# EAGLE board USER (EAGLE 9.3.0)

Size 160 x 100 mm. Coordinates in mm from the lower left corner, seen from the top.
Outline: 0,0 160,0 160,100 0,100 0,0
Copper layers (1*16): Top 0.035mm / dielectric 1.5mm / Bottom 0.035mm
Design rules "default": minimum track width 6mil, minimum drill 0.35mm, track to track 6mil, track to pad 6mil, pad to pad 6mil, via to via 6mil, smd to smd 6mil, copper to edge 40mil, drill to drill 6mil, minimum pad ring 10mil, minimum via ring 8mil, stop-mask expansion 4mil, vias tented up to drill 0mil, thermal gap 10mil

## Footprints (pad centres in the part's own frame; a part is rotated, then mirrored left to right if it is on the bottom)
C0805 = smd 1.3 x 1.5: 1 -0.95,0; 2 0.95,0
085CS_1AR = smd 2.9 x 2.5: + 3.25,0; - -3.25,0
SO14 = smd 0.6 x 2.2: 1 -3.81,-2.6; 2 -2.54,-2.6; 3 -1.27,-2.6; 4 0,-2.6; 5 1.27,-2.6; 6 2.54,-2.6; 7 3.81,-2.6; 8 3.81,2.6; 9 2.54,2.6; 10 1.27,2.6; 11 0,2.6; 12 -1.27,2.6; 13 -2.54,2.6; 14 -3.81,2.6
SC70-5 = smd 0.4 x 0.7: 1 -0.65,-0.85; 2 0,-0.85; 3 0.65,-0.85; 4 0.65,0.85; 5 -0.65,0.85
R0805 = smd 1.3 x 1.5: 1 -0.95,0; 2 0.95,0
RTRIM3224X = smd 1.32 x 1.9: 1 -1.27,-2.54; 3 1.27,-2.54 | smd 2 x 2: 2 0,2.54

## Placement (x,y rotation side)
C3  [C0805]  -15.24,86.36 0 top  (outside the outline)
C4  [C0805]  -20.32,86.36 0 top  (outside the outline)
C5  [085CS_1AR]  -52.07,20.32 0 top  (outside the outline)
C6  [C0805]  -25.4,86.36 0 top  (outside the outline)
C7  [C0805]  -30.48,86.36 0 top  (outside the outline)
C8  [C0805]  -35.56,86.36 0 top  (outside the outline)
C9  [C0805]  -40.64,86.36 0 top  (outside the outline)
C10  [C0805]  -27.94,81.28 0 top  (outside the outline)
C11  [C0805]  -53.34,81.28 0 top  (outside the outline)
C12  [C0805]  -33.02,81.28 0 top  (outside the outline)
C13  [C0805]  -38.1,81.28 0 top  (outside the outline)
C14  [C0805]  -43.18,81.28 0 top  (outside the outline)
C15  [C0805]  -48.26,81.28 0 top  (outside the outline)
IC1  OP11D  [SO14]  -19.05,3.81 0 top  (outside the outline)
IC3  OP11D  [SO14]  -82.55,-5.08 0 top  (outside the outline)
IC4  OP11D  [SO14]  -60.96,3.81 0 top  (outside the outline)
IC5  OP11D  [SO14]  -74.93,3.81 0 top  (outside the outline)
IC6  74AHC1G32DCK  [SC70-5]  -25.4,44.45 0 top  (outside the outline)
IC7  OP11D  [SO14]  -82.55,-26.67 0 top  (outside the outline)
IC8  OP11D  [SO14]  -19.05,12.7 0 top  (outside the outline)
IC9  74AHC1G32DCK  [SC70-5]  -55.88,44.45 0 top  (outside the outline)
IC10  74AHC1G32DCK  [SC70-5]  -71.12,44.45 0 top  (outside the outline)
IC13  OP11D  [SO14]  -60.96,12.7 0 top  (outside the outline)
IC14  74AHC1G32DCK  [SC70-5]  -86.36,44.45 0 top  (outside the outline)
IC17  OP11D  [SO14]  -33.02,21.59 0 top  (outside the outline)
IC18  74AHC1G32DCK  [SC70-5]  -25.4,50.8 0 top  (outside the outline)
IC19  OP11D  [SO14]  -82.55,-48.26 0 top  (outside the outline)
IC20  OP11D  [SO14]  -82.55,-69.85 0 top  (outside the outline)
R1  12k  [R0805]  -80.01,-19.05 0 top  (outside the outline)
R2  27k  [R0805]  -74.93,-19.05 0 top  (outside the outline)
R3  [R0805]  -68.58,81.28 0 top  (outside the outline)
R4  [R0805]  -73.66,81.28 0 top  (outside the outline)
R5  10k  [R0805]  -26.67,76.2 0 top  (outside the outline)
R6  10k  [R0805]  -31.75,76.2 0 top  (outside the outline)
R7  12k  [R0805]  -36.83,76.2 0 top  (outside the outline)
R8  10k  [R0805]  -41.91,76.2 0 top  (outside the outline)
R9  10k  [R0805]  -46.99,76.2 0 top  (outside the outline)
R10  10k  [R0805]  -31.75,50.8 0 top  (outside the outline)
R11  10k  [R0805]  -21.59,76.2 0 top  (outside the outline)
R12  10k  [R0805]  -38.1,50.8 0 top  (outside the outline)
R13  10k  [R0805]  -44.45,50.8 0 top  (outside the outline)
R14  10k  [R0805]  -50.8,50.8 0 top  (outside the outline)
R15  10k  [R0805]  -57.15,50.8 0 top  (outside the outline)
R16  [RTRIM3224X]  -41.91,21.59 0 top  (outside the outline)
R17  [R0805]  -53.34,74.93 0 top  (outside the outline)
R18  [R0805]  -59.69,74.93 0 top  (outside the outline)
R19  [R0805]  -66.04,74.93 0 top  (outside the outline)
R20  [R0805]  -72.39,74.93 0 top  (outside the outline)
R21  27k  [R0805]  -63.5,50.8 0 top  (outside the outline)
R22  1k  [R0805]  -69.85,50.8 0 top  (outside the outline)
R23  1k  [R0805]  -76.2,50.8 0 top  (outside the outline)
R24  1k  [R0805]  -82.55,50.8 0 top  (outside the outline)
R25  1k  [R0805]  -16.51,57.15 0 top  (outside the outline)
R26  1k  [R0805]  -22.86,57.15 0 top  (outside the outline)
R48  [R0805]  -78.74,74.93 0 top  (outside the outline)
R49  [R0805]  -85.09,74.93 0 top  (outside the outline)
R64  [R0805]  -16.51,81.28 0 top  (outside the outline)
R65  [R0805]  -22.86,81.28 0 top  (outside the outline)
R66  1k  [R0805]  -73.66,-3.81 0 top  (outside the outline)
R67  1k  [R0805]  -86.36,-12.7 0 top  (outside the outline)
R68  1k  [R0805]  -80.01,-12.7 0 top  (outside the outline)
R69  1k  [R0805]  -73.66,-12.7 0 top  (outside the outline)
R70  1k  [R0805]  -86.36,-19.05 0 top  (outside the outline)
R71  12k  [R0805]  -73.66,-25.4 0 top  (outside the outline)
R72  27k  [R0805]  -86.36,-34.29 0 top  (outside the outline)
R73  1k  [R0805]  -80.01,-34.29 0 top  (outside the outline)
R74  1k  [R0805]  -73.66,-34.29 0 top  (outside the outline)
R75  1k  [R0805]  -86.36,-40.64 0 top  (outside the outline)
R76  1k  [R0805]  -80.01,-40.64 0 top  (outside the outline)
R77  1k  [R0805]  -73.66,-40.64 0 top  (outside the outline)
R78  12k  [R0805]  -73.66,-46.99 0 top  (outside the outline)
R79  27k  [R0805]  -86.36,-55.88 0 top  (outside the outline)
R80  1k  [R0805]  -80.01,-55.88 0 top  (outside the outline)
R81  1k  [R0805]  -73.66,-55.88 0 top  (outside the outline)
R82  1k  [R0805]  -86.36,-62.23 0 top  (outside the outline)
R83  1k  [R0805]  -80.01,-62.23 0 top  (outside the outline)
R84  1k  [R0805]  -73.66,-62.23 0 top  (outside the outline)
R85  12k  [R0805]  -73.66,-68.58 0 top  (outside the outline)
R86  27k  [R0805]  -86.36,-77.47 0 top  (outside the outline)
R87  1k  [R0805]  -80.01,-77.47 0 top  (outside the outline)
R88  1k  [R0805]  -73.66,-77.47 0 top  (outside the outline)
R89  1k  [R0805]  -86.36,-83.82 0 top  (outside the outline)
R90  1k  [R0805]  -80.01,-83.82 0 top  (outside the outline)
R91  1k  [R0805]  -73.66,-83.82 0 top  (outside the outline)

## Library data of the parts
C3-C15 = rcl; SPICEPREFIX: C
IC1 IC3-IC5 IC7 IC8 IC13 IC17 IC19 IC20 = linear
IC6 IC9 IC10 IC14 IC18 = 74xx-little-de
R1-R15 R17-R26 R48 R49 R64-R91 = rcl; SPICEPREFIX: R
R16 = rcl; SPICEMODEL: X; SPICEPREFIXL: POT

## Nets
+0.5V: IC1.5 IC4.5 IC5.5 IC13.5 IC17.5 R14.1 R15.2
+1.0V: R13.1 R14.2 R23.2 R67.2 R74.2 R81.2 R88.2
+4.0V: R6.1 R8.2
+4.5V: IC1.2 IC4.2 IC5.2 IC13.2 IC17.2 R5.1 R6.2
+5V: C3.1 C4.1 C5.+ R5.2 R16.3
APPS1: R71.2
APPS1_P: IC5.3 IC5.6 IC7.1
APPS1PLAUS: IC10.4
APPS2: R78.2
APPS2_P: IC1.3 IC1.6 IC19.1
APPS2PLAUS: IC6.4
BOTS: R7.2
BOTS_P: IC4.3 IC4.6 IC8.1
BOTSPLAUS: IC9.4
GND: C3.2 C4.2 C5.- C6.2 C7.2 C8.2 C9.2 C10.2 C11.2 C12.2 C13.2 C14.2 C15.2 IC6.3 IC9.3 IC10.3 IC14.3 IC18.3 R2.1 R15.1 R16.1 R21.1 R24.2 R26.2 R68.2 R70.2 R72.1 R75.2 R77.2 R79.1 R82.2 R84.2 R86.1 R89.2 R91.2
HVD: R85.2
HVD_D: IC17.6
HVD_P: IC17.3 IC20.1
HVDPLAUS: IC18.4
INERTIA: R1.2
INERTIA_P: IC3.1
INTERTIA_P: IC13.3 IC13.6
INTERTIAPLAUS: IC14.4
N$1: IC3.3 R68.1 R69.2
N$2: R8.1 R9.2
N$3: IC4.1 R19.1
N$4: R9.1 R10.2
N$5: R11.1 R12.2
N$6: IC5.1 R17.1
N$7: R12.1 R13.2
N$8: R1.1 R2.2 R66.2
N$9: R10.1 R11.2
N$10: R69.1 R70.1
N$11: IC3.2 R66.1 R67.1
N$12: C6.1 IC5.10 R17.2
N$13: C7.1 IC5.12 R18.2
N$14: IC5.7 R18.1
N$15: IC1.1 R3.1
N$16: C10.1 IC1.10 R3.2
N$17: C11.1 IC1.12 R4.2
N$18: IC1.7 R4.1
N$20: C8.1 IC4.10 R19.2
N$23: C9.1 IC4.12 R20.2
N$24: IC4.7 R20.1
N$26: IC1.8 IC6.1
N$27: IC1.14 IC6.2
N$28: IC8.3 R24.1 R25.2
N$29: R7.1 R21.2 R22.2
N$30: R25.1 R26.1
N$31: IC8.2 R22.1 R23.1
N$34: IC4.8 IC9.1
N$35: IC4.14 IC9.2
N$42: IC13.1 R48.1
N$43: C12.1 IC13.10 R48.2
N$44: IC7.3 R75.1 R76.2
N$45: R71.1 R72.2 R73.2
N$46: IC5.8 IC10.1
N$47: IC5.14 IC10.2
N$48: C13.1 IC13.12 R49.2
N$49: IC13.7 R49.1
N$50: IC13.8 IC14.1
N$51: IC13.14 IC14.2
N$60: IC17.1 R64.1
N$61: C14.1 IC17.10 R64.2
N$62: C15.1 IC17.12 R65.2
N$63: IC17.7 R65.1
N$64: IC17.8 IC18.1
N$65: IC17.14 IC18.2
N$66: R76.1 R77.1
N$67: IC7.2 R73.1 R74.1
N$68: IC19.3 R82.1 R83.2
N$69: R78.1 R79.2 R80.2
N$70: R83.1 R84.1
N$71: IC19.2 R80.1 R81.1
N$72: IC20.3 R89.1 R90.2
N$73: R85.1 R86.2 R87.2
N$74: R90.1 R91.1
N$75: IC20.2 R87.1 R88.1
TIMETHRESH: IC1.9 IC1.13 IC4.9 IC4.13 IC5.9 IC5.13 IC13.9 IC13.13 IC17.9 IC17.13
TIMETRESH: R16.2
V+: IC1.4 IC3.4 IC4.4 IC5.4 IC7.4 IC8.4 IC13.4 IC17.4 IC19.4 IC20.4
V-: IC1.11 IC3.11 IC4.11 IC5.11 IC7.11 IC8.11 IC13.11 IC17.11 IC19.11 IC20.11
VCC: IC6.5 IC9.5 IC10.5 IC14.5 IC18.5

## Tracks (layer width: path | path; a pad name or v marks a point on that pad's centre or on a via)
+0.5V  (6 unrouted)
+1.0V  (6 unrouted)
+4.0V  (1 unrouted)
+4.5V  (6 unrouted)
+5V  (4 unrouted)
APPS1_P  (2 unrouted)
APPS2_P  (2 unrouted)
BOTS_P  (2 unrouted)
GND  (34 unrouted)
HVD_P  (1 unrouted)
INTERTIA_P  (1 unrouted)
N$1  (2 unrouted)
N$2  (1 unrouted)
N$3  (1 unrouted)
N$4  (1 unrouted)
N$5  (1 unrouted)
N$6  (1 unrouted)
N$7  (1 unrouted)
N$8  (2 unrouted)
N$9  (1 unrouted)
N$10  (1 unrouted)
N$11  (2 unrouted)
N$12  (2 unrouted)
N$13  (2 unrouted)
N$14  (1 unrouted)
N$15  (1 unrouted)
N$16  (2 unrouted)
N$17  (2 unrouted)
N$18  (1 unrouted)
N$20  (2 unrouted)
N$23  (2 unrouted)
N$24  (1 unrouted)
N$26  (1 unrouted)
N$27  (1 unrouted)
N$28  (2 unrouted)
N$29  (2 unrouted)
N$30  (1 unrouted)
N$31  (2 unrouted)
N$34  (1 unrouted)
N$35  (1 unrouted)
N$42  (1 unrouted)
N$43  (2 unrouted)
N$44  (2 unrouted)
N$45  (2 unrouted)
N$46  (1 unrouted)
N$47  (1 unrouted)
N$48  (2 unrouted)
N$49  (1 unrouted)
N$50  (1 unrouted)
N$51  (1 unrouted)
N$60  (1 unrouted)
N$61  (2 unrouted)
N$62  (2 unrouted)
N$63  (1 unrouted)
N$64  (1 unrouted)
N$65  (1 unrouted)
N$66  (1 unrouted)
N$67  (2 unrouted)
N$68  (2 unrouted)
N$69  (2 unrouted)
N$70  (1 unrouted)
N$71  (2 unrouted)
N$72  (2 unrouted)
N$73  (2 unrouted)
N$74  (1 unrouted)
N$75  (2 unrouted)
TIMETHRESH  (9 unrouted)
V+  (9 unrouted)
V-  (9 unrouted)
VCC  (4 unrouted)